# Altium PCB PCB_y262lpt_2022-03-24.pcbdoc
Units mil, origin at the board's own origin, x right, y up, seen from the top; angles counter-clockwise.
Board outline 3740 x 3696.58 mil, 2 copper layers (Top Layer, Bottom Layer); 29 components, 43 nets, 164 pads, 13 vias.
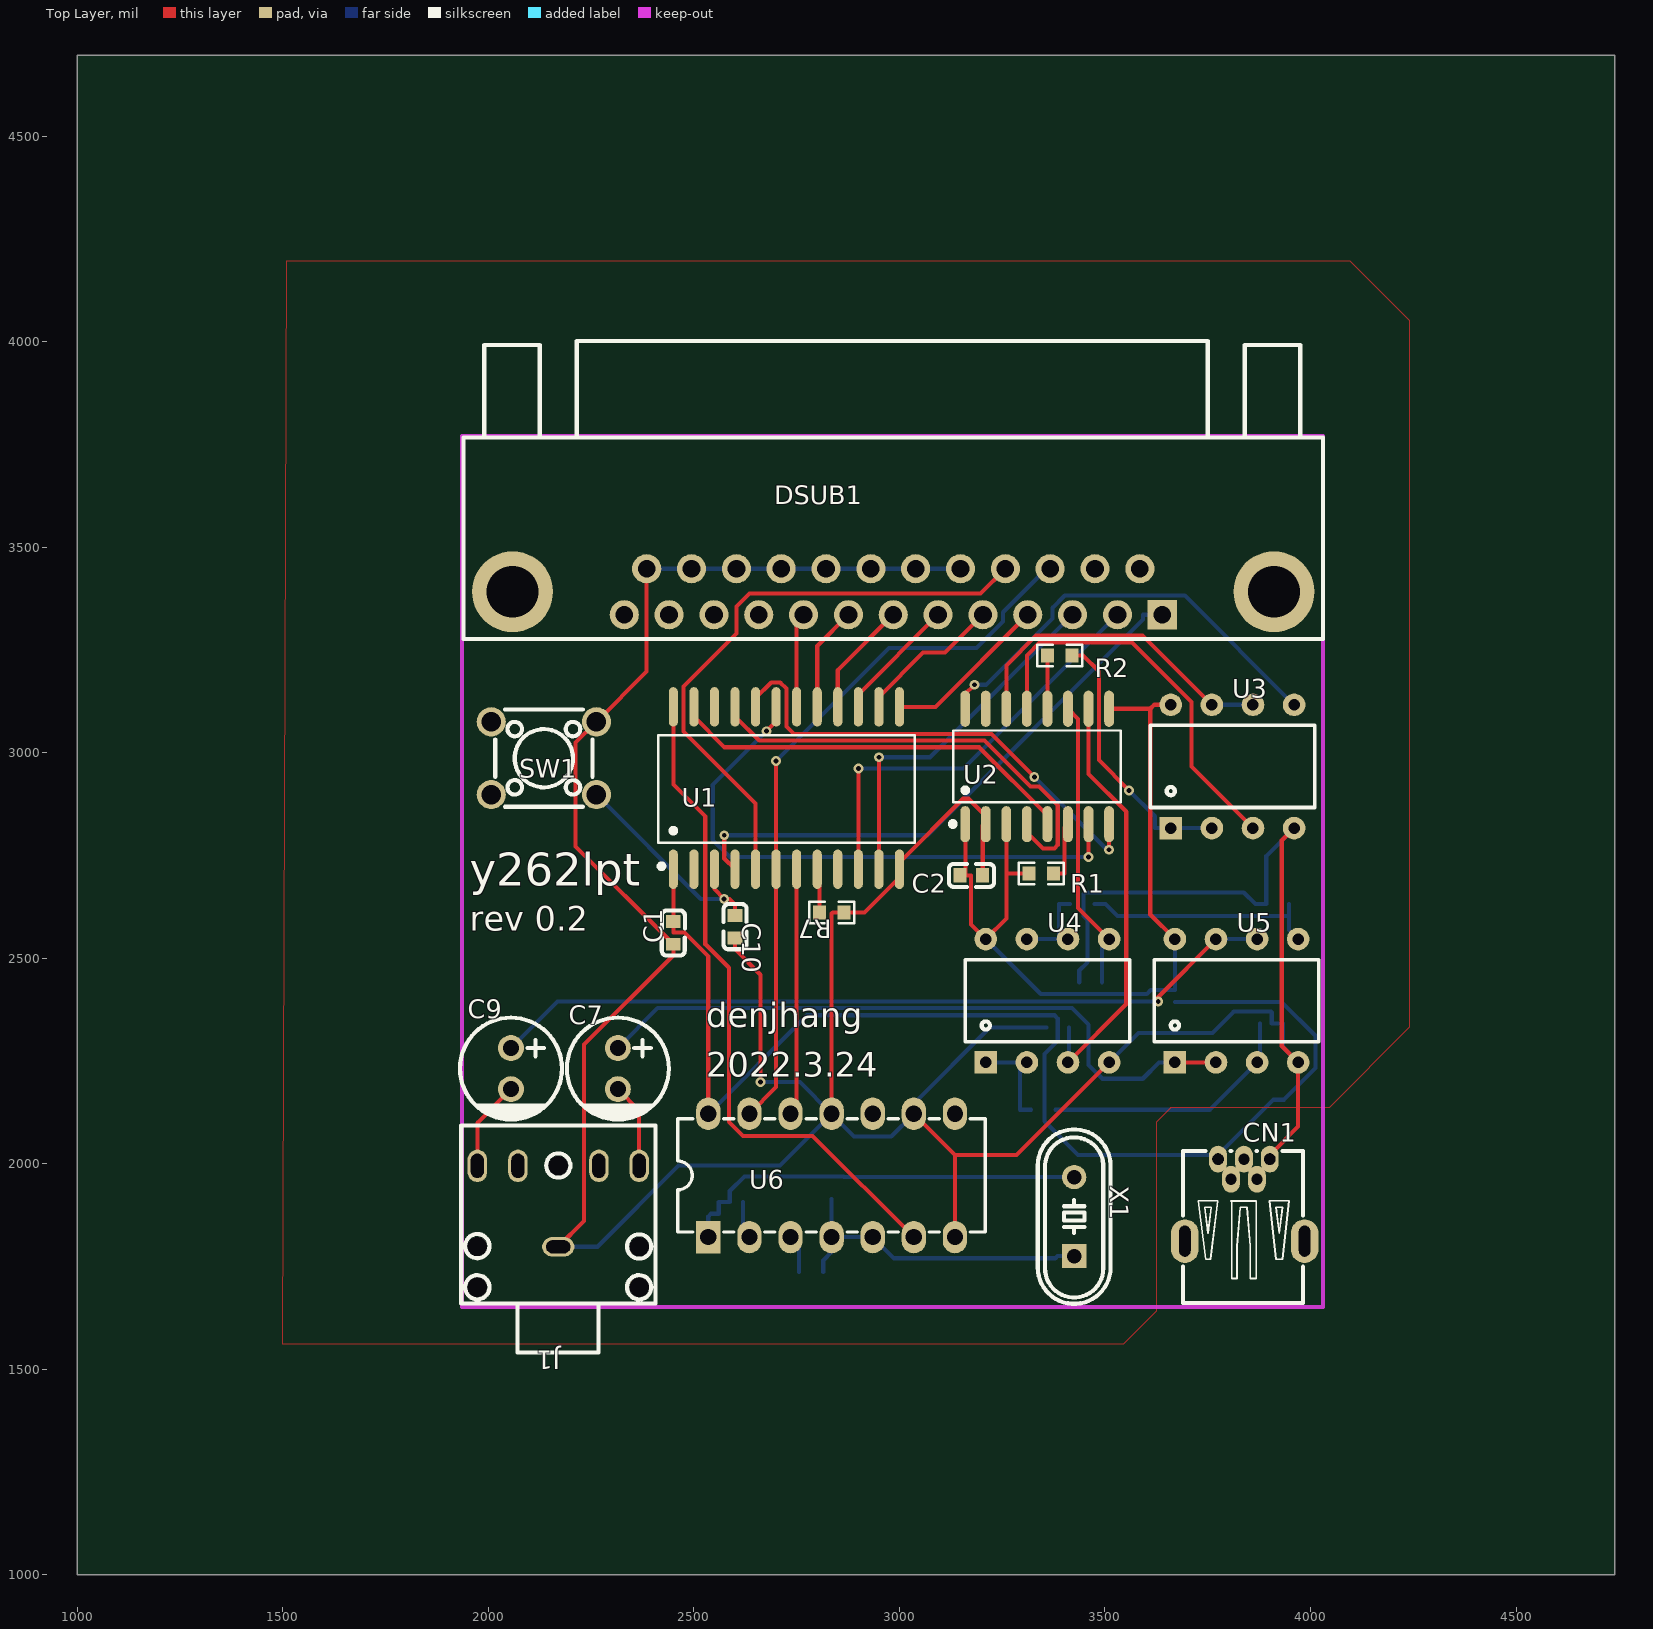
[diagram p0: Top Layer view]
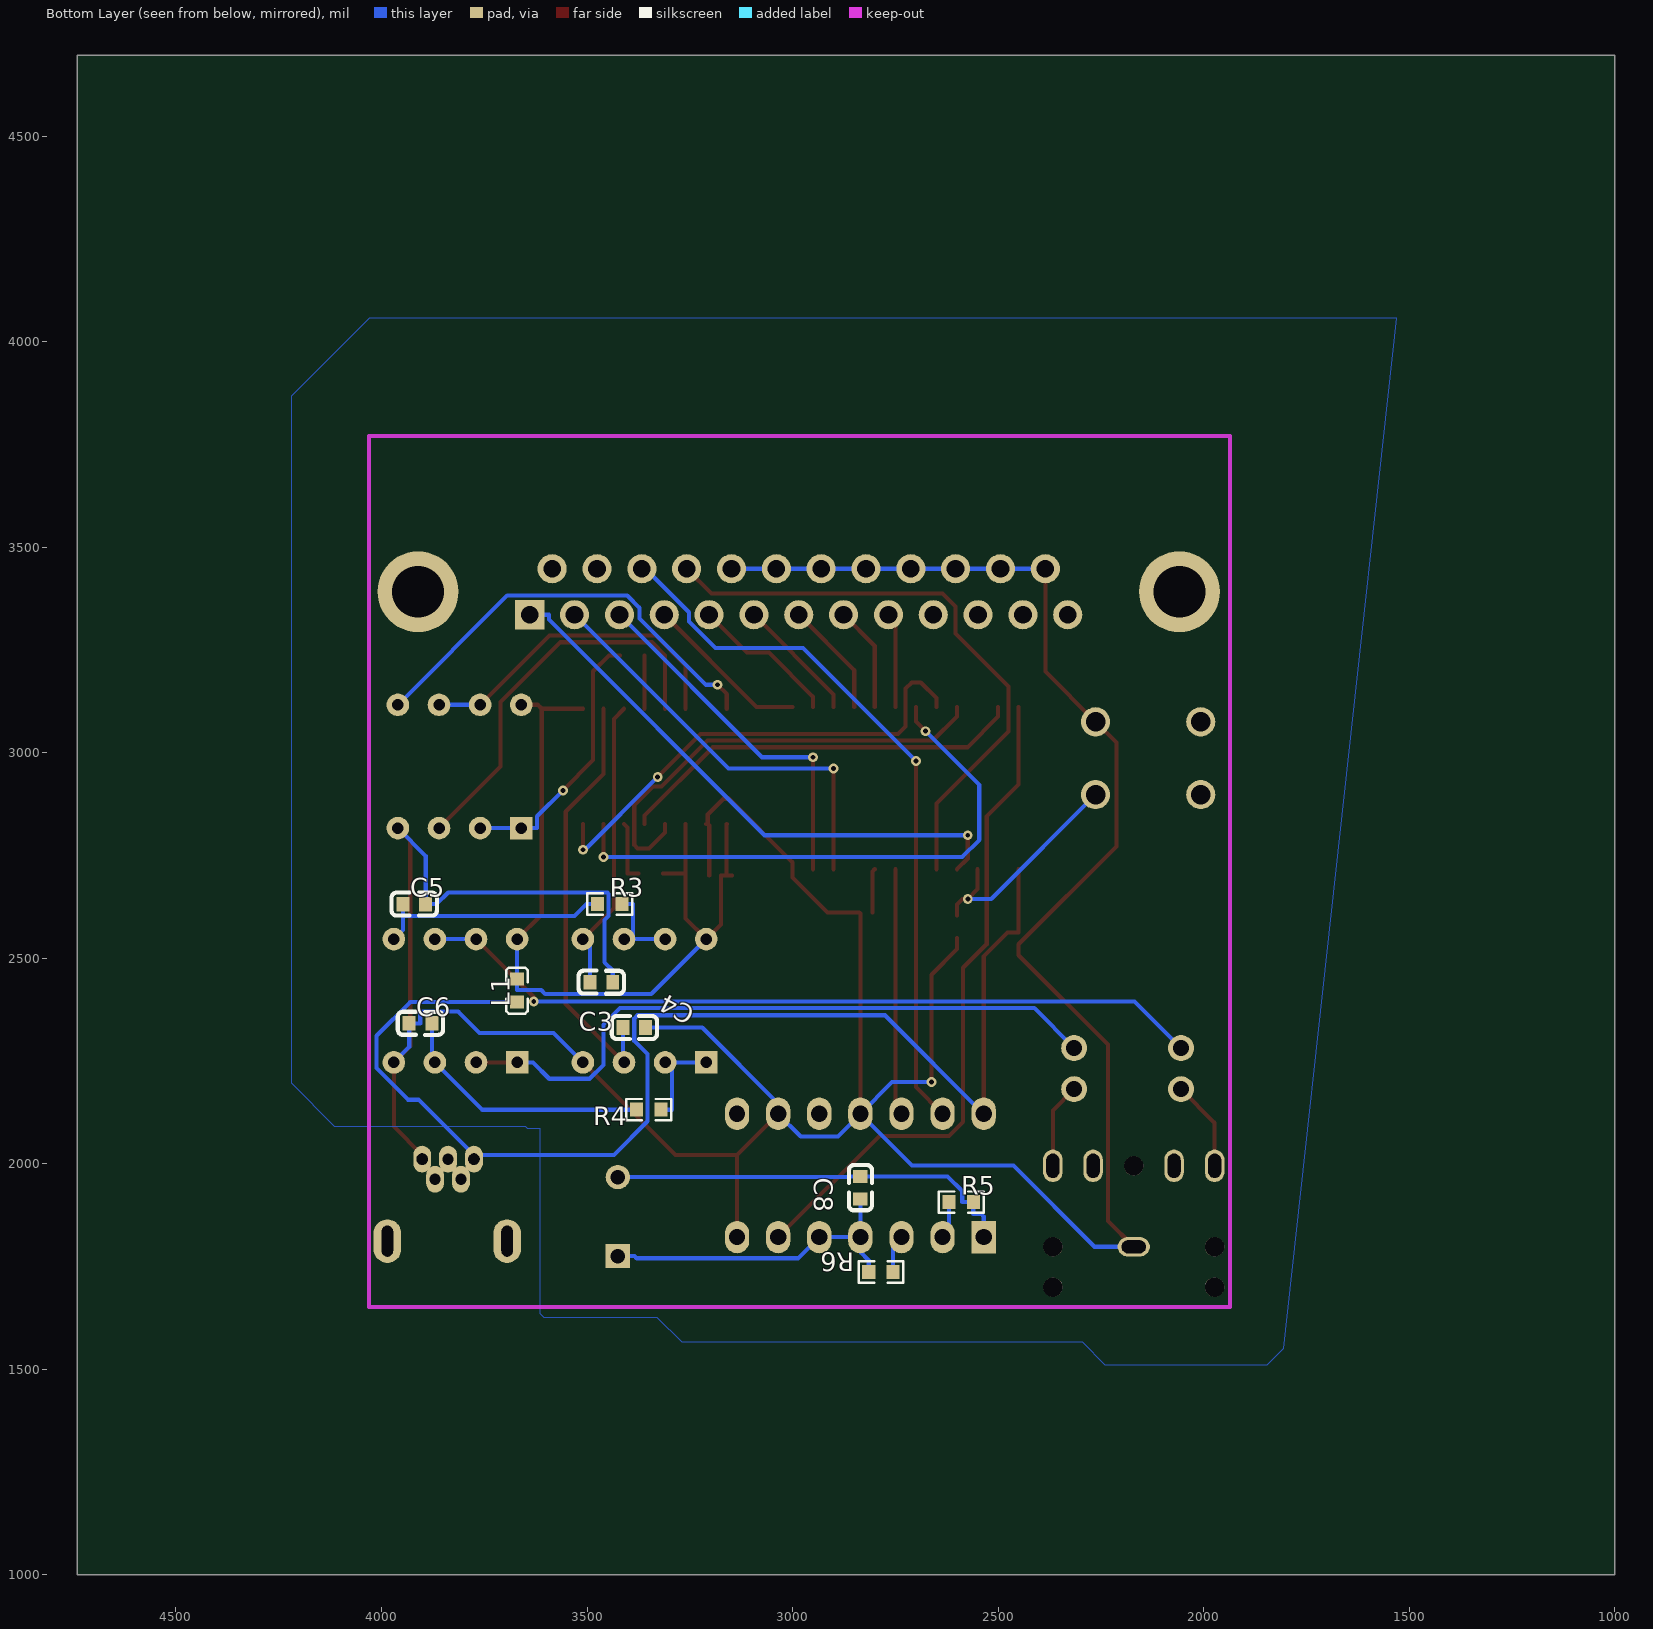
[diagram p1: Bottom Layer view, seen from below]

## Layer stack, top to bottom
Top Layer: signal copper (thickness not stored)
Dielectric: dielectric 12.6, FR-4, Dk 4.8
Bottom Layer: signal copper (thickness not stored)

## Board outline
4740,1000 1000,1000 1000,4696.58 4740,4696.58

## Components (designator, comment, footprint, x,y, rotation, side; value= is the part's Value field where it differs from the comment)
C1 "0.1u" C0603#1 2450,2561.58 r90 top
C2 "0.1u" C0603#1 3175,2701.58 r180 top
C3 "1.5n" C0603#2 3465,2441.58 r0 bottom
C4 "1.5n" C0603#2 3385,2331.58 r180 bottom
C5 "10n" C0603#2 3920,2631.58 r0 bottom
C6 "10n" C0603#2 3905,2341.58 r0 bottom
C7 "4.7uF" CAP-TH_BD6.3-P2.50-D1.0-FD 2315,2231.58 r270 top
C8 "4.7n" C0603#2 2835,1941.58 r90 bottom
C9 "4.7uF" CAP-TH_BD6.3-P2.50-D1.0-FD 2055,2231.58 r270 top
C10 "2.2n" C0603#1 2600,2576.58 r270 top
CN1 "54819-0519" USB-MINI-SMD_5P-P0.80-H-F_54819-0519 3840,1916.58 r0 top
DSUB1 "FDB2501-M0DB300K6KA" DB25-TH_FDB2501-M0DB300K6KA 2984.96,3391.59 r180 top
J1 "PJ-307C" AUDIO-TH_PJ307C 2170,1896.58 r180 top
L1 "100Ω" L0603 3670,2421.58 r270 bottom
R1 "4.7k" R0603#1 3345,2706.58 r0 top
R2 "100R" R0603#1 3390,3236.58 r180 top
R3 "1.8k" R0603#2 3445,2631.58 r0 bottom
R4 "1.8k" R0603#2 3350,2131.58 r0 bottom
R5 "470r" R0603#2 2590,1906.58 r0 bottom
R6 "470r" R0603#2 2785,1736.58 r180 bottom
R7 "10k" R0603#1 2835,2611.58 r180 top
SW1 "C13828" SW-TH_4P-L6.0-W6.0-P4.50-LS6.5 2135,2986.58 r180 top
U1 "YMF262-M" YMF262-M 2725,2911.58 r0 top
U2 "YAC512" SOP-16_L10.3-W5.4-P1.27-LS7.8-BL 3335,2966.58 r0 top
U3 "SA5532AP" DIP8 3810,2966.58 r0 top
U4 "SA5532AP" DIP8 3360,2396.58 r0 top
U5 "SA5532AP" DIP8 3820,2396.58 r0 top
U6 "SN74HCT04N" DIP-14_L19.0-W7.0-P2.54-LS7.6-BL 2835,1971.58 r0 top
X1 "14.31818MHZ" HC-49US_L11.5-W4.5-P4.88 3425,1871.58 r90 top

## Footprints (in the part's own frame and the unit in brackets; to place one, negate y for a bottom-side part, rotate by r counter-clockwise, add the part's x,y. Pads: shape width x height; smd on the part's side, far side on the other; paste and mask are expansions set on the pad)
AUDIO-TH_PJ307C [mm]
  oval 2x1.2 hole 0.8 slot 1.5 at 0 deg: 1(0,2.5)
  oval 1.2x2 hole 0.8 slot 1.5 at 90 deg: 2(5,-2.5) 3(2.489,-2.5) 4(-2.511,-2.5) 5(-5,-2.5)
  round 1.2 hole 1.2 unplated: ""(-5,5) ""(-5,2.5) ""(0,-2.5) ""(5,5) ""(5,2.5)
  silkscreen extent -6.01,-4.99 5.99,9.03
C0603#1 [mm]
  rect 0.8x0.9 smd: 1(-0.7,0) 2(0.7,0)
  silkscreen extent -1.41,-0.71 1.39,0.72
C0603#2 [mm]
  rect 0.8x0.9 smd: 1(0.7,0) 2(-0.7,0)
  silkscreen extent -1.39,-0.72 1.41,0.71
CAP-TH_BD6.3-P2.50-D1.0-FD [mm]
  round 1.6 hole 1: 1(-1.27,0) 2(1.27,0)
  silkscreen extent -3.15,-3.15 3.17,3.15
DB25-TH_FDB2501-M0DB300K6KA [mm]
  rect 1.8x1.8 hole 1.1: 1(-16.62,1.42)
  round 1.8 hole 1.1: 2(-13.85,1.42) 3(-11.08,1.42) 4(-8.31,1.42) 5(-5.54,1.42) 6(-2.77,1.42) 7(0,1.42) 8(2.77,1.42) 9(5.54,1.42) 10(8.31,1.42) 11(11.08,1.42) 12(13.85,1.42) 13(16.62,1.42) 14(-15.235,-1.42) 15(-12.465,-1.42) 16(-9.695,-1.42) 17(-6.925,-1.42) 18(-4.155,-1.42) 19(-1.385,-1.42) 20(1.385,-1.42) 21(4.155,-1.42) 22(6.925,-1.42) 23(9.695,-1.42) 24(12.465,-1.42) 25(15.235,-1.42)
  round 5 hole 3.2: 26(-23.52,0) 27(23.52,0)
  silkscreen extent -26.54,-15.49 26.54,2.92
DIP8 [mil]
  rect 55x55 hole 28: 1(-150,-150)
  round 55 hole 28: 2(-50,-150) 3(50,-150) 4(150,-150) 5(150,150) 6(50,150) 7(-50,150) 8(-150,150)
  silkscreen extent -200,-100 200,100
DIP-14_L19.0-W7.0-P2.54-LS7.6-BL [mm]
  rect 1.5x2 hole 1: 1(-7.62,-3.81)
  oval 1.5x2 hole 1: 2(-5.08,-3.81) 3(-2.54,-3.81) 4(0,-3.81) 5(2.54,-3.81) 6(5.08,-3.81) 7(7.62,-3.81) 8(7.62,3.81) 9(5.08,3.81) 10(2.54,3.81) 11(0,3.81) 12(-2.54,3.81) 13(-5.08,3.81) 14(-7.62,3.81)
  silkscreen extent -9.5,-3.5 9.5,3.5
HC-49US_L11.5-W4.5-P4.88 [mm]
  rect 1.5x1.5 hole 0.9: 1(-2.44,0)
  round 1.5 hole 0.9: 2(2.44,0)
  silkscreen extent -5.39,-2.25 5.39,2.25
L0603 [mm]
  rect 0.8x0.864 smd: 1(0.7,0) 2(-0.7,0)
  silkscreen extent -1.41,-0.67 1.42,0.65
R0603#1 [mil]
  rect 31.75x34.02 smd: 1(-29.66,0) 2(29.66,0)
  silkscreen extent -55,-26 55,26
R0603#2 [mil]
  rect 31.75x34.02 smd: 1(29.66,0) 2(-29.66,0)
  silkscreen extent -55,-26 55,26
SOP-16_L10.3-W5.4-P1.27-LS7.8-BL [mil]
  oval 23.7x87.83 smd: 1(-175,-140.37) 2(-125,-140.37) 3(-75,-140.37) 4(-25,-140.37) 5(25,-140.37) 6(75,-140.37) 7(125,-140.37) 8(175,-140.37) 9(175,140.37) 10(125,140.37) 11(75,140.37) 12(25,140.37) 13(-25,140.37) 14(-75,140.37) 15(-125,140.37) 16(-175,140.37)
  silkscreen extent -211,-146 204,87
SW-TH_4P-L6.0-W6.0-P4.50-LS6.5 [mm]
  round 1.8 hole 1.2: 1(-3.25,2.25) 2(3.25,2.25) 3(-3.25,-2.25) 4(3.25,-2.25)
  silkscreen extent -3,-3 3,3
USB-MINI-SMD_5P-P0.80-H-F_54819-0519 [mm]
  oval 1.1x1.65 hole 0.7 slot 0.705 at 90 deg: 1(-1.65,2.409) 5(1.55,2.409)
  oval 1.1x1.65 hole 0.7: 2(-0.848,1.166) 3(-0.05,2.409) 4(0.752,1.166)
  oval 1.7x2.7 hole 0.7 slot 1.901 at 90 deg: 6(3.7,-2.664) 7(-3.7,-2.664)
  silkscreen extent -3.81,-6.48 3.6,2.92
YMF262-M [mm]
  oval 0.56x2.432 smd: 1(-6.985,-4.953) 2(-5.715,-4.953) 3(-4.445,-4.953) 4(-3.175,-4.953) 5(-1.905,-4.953) 6(-0.635,-4.953) 7(0.635,-4.953) 8(1.905,-4.953) 9(3.175,-4.953) 10(4.445,-4.953) 11(5.715,-4.953) 12(6.985,-4.953) 13(6.985,5.08) 14(5.715,5.08) 15(4.445,5.08) 16(3.175,5.08) 17(1.905,5.08) 18(0.635,5.08) 19(-0.635,5.08) 20(-1.905,5.08) 21(-3.175,5.08) 22(-4.445,5.08) 23(-5.715,5.08) 24(-6.985,5.08)
  silkscreen extent -7.92,-4.92 7.92,3.32

## Via types
v1: diameter 24.02, hole 12.01, Top Layer to Bottom Layer, tented both sides, 13 vias

## Nets (pads, with @x,y where several pads share a name; then routed paths per layer and width w, separated by ;. In a path a pad name is that pad's centre, name@x,y a point inside that pad or via, vN(x,y) a via of type N, cw(c..) or ccw(c..) an arc to the next point about the centre after c; other vN are vias at no path point)
1A: C8.1 R5.2 U6.1 X1.2 | length 1013.4
  Bottom Layer w10: U6.1 2535,1871.94 2541.64,1878.58 2560.34,1878.58 2560.34,1892.58 R5.2 2587.21,1906.58 2587.21,1933.45 2622.9,1969.14 C8.1 2863.71,1969.14 2865.21,1967.64 X1.2
1Y: R5.1 U6.2 | length 91.4
  Bottom Layer w10: R5.1 2619.66,1836.92 U6.2
2A: R6.1 U6.3 | length 93.4
  Bottom Layer w10: U6.3 2755.34,1801.24 R6.1
2Y: C8.2 R6.2 U6.4 U6.5 X1.1 | length 799.4
  Bottom Layer w10: R6.2 2814.66,1764.58 2835,1784.92 U6.4 ; C8.2 U6.4 ; X1.1 3384.48,1775.52 3379.05,1770.09 2986.49,1770.09 U6.5 U6.4
/CS: R7.2 U1.8 | length 107.2
  Top Layer w10: U1.8 2805.34,2711.24 R7.2
/IC: C10.1 SW1.1 U1.3 | length 556.5
  Top Layer w10: U1.3 2550,2668.03 v1(2573.72,2644.31) 2586.57,2644.31 2600,2630.88 C10.1
  Bottom Layer w10: SW1.1 2516.64,2644.31 v1(2573.72,2644.31)
/RD: U1.7 U6.12 | length 601.2
  Top Layer w10: U6.12 2750,2136.58 U1.7
/WR: DSUB1.16 U1.6 U6.13 | length 1759
  Top Layer w10: U6.13 2700,2186.58 U1.6 v1(2700,2979.89)
  Bottom Layer w10: v1(2700,2979.89) 2974.84,3254.73 3187.87,3254.73 3251.93,3318.79 3251.93,3341.73 3357.69,3447.49 DSUB1.16@3366.65,3447.49
A0: DSUB1.1 U1.4 | length 1387.9
  Top Layer w10: v1(2573.87,2799.2) 2573.87,2742.71 U1.4
  Bottom Layer w10: v1(2573.87,2799.2) 3067.99,2799.2 3592.87,3324.08 3592.87,3335.68 DSUB1.1
A1: DSUB1.17 U1.5 | length 1456.7
  Top Layer w10: U1.5 2650,2876.69 2475,3051.69 2475,3161.06 2603.7,3289.76 2603.7,3355.41 2635.64,3387.35 3197.46,3387.35 DSUB1.17
A.VCC: C2.2 L1.2 R1.1 U2.1 U2.3 U2.9 U3.8 U4.8 U5.8 | length 2060
  Top Layer w10: C2.2 C2.2@3160.81,2701.58 ; U2.1 3160.81,2825.4 C2.2@3160.81,2701.58 ; U2.3 3260,2706.58 ; R1.1 3288.48,2706.58 3260,2706.58 ; U2.9 3610.11,3106.95 ; U3.8 3619.74,3116.58 3610.11,3106.95 ; U5.8 3610.11,2606.47 3610.11,3106.95 ; C2.2@3160.81,2701.58 3174.18,2701.58 3174.18,2582.4 U4.8 3260,2596.58 3260,2706.58
  Bottom Layer w10: U4.8 3343.78,2412.8 3601.74,2412.8 3611.34,2422.4 3670.01,2422.4 L1.2 U5.8
AOUT: U2.13 U3.3 | length 972.2
  Top Layer w10: U2.13 3310,3236.59 3342.19,3268.78 3564.75,3268.78 3710,3123.53 3710,2966.58 U3.3
CH1: C4.2 U2.10 U4.3 | length 1043.2
  Top Layer w10: U4.3 3551.79,2388.37 3551.79,2856.46 3460,2948.25 U2.10
  Bottom Layer w10: U4.3 3412.56,2249.14 C4.2
CH2: C3.1 U2.11 U4.5 | length 714
  Top Layer w10: U2.11 3434.54,3082.41 3434.54,2622.04 U4.5
  Bottom Layer w10: C3.1 3492.56,2529.14 U4.5
CV: U2.16 U3.5 | length 1060.1
  Top Layer w10: U2.16 3160,3142.28 v1(3182.97,3165.25)
  Bottom Layer w10: v1(3182.97,3165.25) 3210.98,3165.25 3372.32,3326.59 3372.32,3352.56 3402.17,3382.41 3694.17,3382.41 U3.5
D0: DSUB1.2 U1.10 | length 1030.2
  Top Layer w10: U1.10 v1(2900,2961.64)
  Bottom Layer w10: v1(2900,2961.64) 3156.19,2961.64 DSUB1.2
D1: DSUB1.3 U1.11 | length 887.2
  Top Layer w10: U1.11 v1(2950,2989.02)
  Bottom Layer w10: v1(2950,2989.02) 3074.52,2989.02 DSUB1.3
D2: DSUB1.4 U1.13 | length 404.9
  Top Layer w10: U1.13 3088.02,3111.58 DSUB1.4
D3: DSUB1.5 U1.14 | length 360.2
  Top Layer w10: U1.14 2950,3136.01 3057.58,3243.59 3110.98,3243.59 DSUB1.5
D4: DSUB1.6 U1.15 | length 304.5
  Top Layer w10: U1.15 2900,3141.66 DSUB1.6
D5: DSUB1.7 U1.16 | length 280
  Top Layer w10: U1.16 2850,3200.72 DSUB1.7
D6: DSUB1.8 U1.17 | length 255.5
  Top Layer w10: U1.17 2800,3259.78 DSUB1.8
D7: DSUB1.9 U1.18 | length 231.1
  Top Layer w10: U1.18 2750,3318.83 DSUB1.9@2766.85,3335.68
DOAB: U1.21 U2.4 | length 1109.2
  Top Layer w10: U1.21 2600,3088.19 2658.95,3029.24 3207.35,3029.24 3318.48,2918.11 3339.2,2918.11 3385,2872.31 3385,2775.21 3377.15,2767.36 3348.98,2767.36 3310,2806.34 U2.4
GND: C1.1 C2.1 C3.2 C4.1 C5.2 C6.1 C10.2 CN1.5 DSUB1.18 DSUB1.19 DSUB1.20 DSUB1.21 DSUB1.22 DSUB1.23 DSUB1.24 DSUB1.25 J1.1 R7.1 SW1.3 U1.12 U2.2 U3.4 U4.4 U5.4 U6.7 U6.9 U6.11 | length 9085.6
  Top Layer w10: J1.1 2232.48,1860.63 2232.48,2289.76 2450,2507.28 C1.1 2212.26,2771.76 2212.26,3024.47 SW1.3 2385.16,3197.37 DSUB1.25 ; C10.2 2600,2522.28 2662.45,2459.83 v1(2662.45,2198.52) ; U6.11 2835,2608.79 2837.79,2611.58 2854.5,2611.58 R7.1 2915.23,2611.58 3000,2696.35 U1.12 3000,2733.42 3154.57,2887.99 3168.04,2887.99 3206.28,2849.75 U2.2@3206.28,2826.21 ; U6.9 3135,2021.58 ; U6.7 3135,2021.58 ; C2.1 3202.56,2822.49 U2.2@3206.28,2826.21 ; U2.2 U2.2@3206.28,2826.21 ; U4.4 3285,2021.58 3135,2021.58 ; CN1.5@3901.02,2021.44 3970,2090.42 U5.4 3930.01,2286.57 3930.01,2786.59 U3.4
  Bottom Layer w10: J1.1 2265.03,1798.15 2462.83,1995.95 2709.37,1995.95 U6.11 ; DSUB1.25 DSUB1.24 DSUB1.23 DSUB1.22 DSUB1.21 DSUB1.20 DSUB1.19 DSUB1.18 ; v1(2662.45,2198.52) 2758.06,2198.52 U6.11 ; C4.1 3219.71,2331.58 3035,2146.87 U6.9 2980.1,2066.68 2889.9,2066.68 U6.11 ; C3.2 3437.44,2470.29 3457.33,2490.18 3457.33,2593.15 3447.72,2602.76 3447.72,2656.74 3450.63,2659.65 3837.63,2659.65 3865.7,2631.58 C5.2 3892.44,2749.02 U3.4 ; U4.4 3581.6,2318.18 3761.16,2318.18 3813.37,2370.39 3903.75,2370.39 3905.82,2368.32 3905.82,2341.58 C6.1 3932.56,2284.02 U5.4
M: U1.24 U6.6 | length 1631.5
  Top Layer w10: U1.24 2450,2923 2527.74,2845.26 2527.74,2534.11 2585,2476.85 2585,2102.18 2619.36,2067.82 2788.76,2067.82 U6.6
MP: U2.14 U3.6 U3.7 | length 805.2
  Top Layer w10: U2.14 3260,3212.44 3332.4,3284.84 3591.74,3284.84 U3.7
  Bottom Layer w10: U3.7 U3.6
OUT.L: C7.2 J1.5 | length 208.1
  Top Layer w10: C7.2 2366.85,2129.73 J1.5@2366.85,1995
OUT.R: C9.2 J1.2 | length 220.5
  Top Layer w10: J1.2 1973.15,2099.73 C9.2
S$164: 
SMPAC: U1.20 U2.8 | length 1181.3
  Top Layer w10: U1.20 2650,3132.62 2688.16,3170.78 2709.95,3170.78 2725,3155.73 2725,3063.58 2743.28,3045.3 3223.9,3045.3 v1(3328.03,2941.17) ; v1(3509.4,2763.91) 3509.4,2825.61 U2.8
  Bottom Layer w10: v1(3328.03,2941.17) 3505.29,2763.91 v1(3509.4,2763.91)
SMPBC: U1.19 U2.7 | length 1398.5
  Top Layer w10: v1(2676.37,3052.3) 2700,3075.93 U1.19 ; v1(3460,2746.54) U2.7
  Bottom Layer w10: v1(2676.37,3052.3) 2545.72,2921.65 2545.72,2788.16 2587.34,2746.54 v1(3460,2746.54)
SWIN: R2.2 U2.12 | length 129.8
  Top Layer w10: U2.12 3360.34,3107.29 R2.2
SY: U1.23 U2.5 | length 1004.6
  Top Layer w10: U1.23 2500,3087.77 2574.58,3013.19 3194.21,3013.19 3360,2847.4 U2.5
U2_6: R1.2 U2.6 | length 150
  Top Layer w10: R1.2 3401.52,2706.58 3401.52,2817.73 U2.6
U3_1: R2.1 U3.1 U3.2 | length 657.8
  Top Layer w10: R2.1 3446.52,3236.58 3485,3198.1 3485,2981.95 v1(3558.49,2908.46)
  Bottom Layer w10: v1(3558.49,2908.46) 3621.51,2845.44 3621.51,2816.58 U3.1 U3.2
U4_1: R4.2 U4.1 U4.2 | length 241.9
  Bottom Layer w10: U4.1 U4.2@3293.48,2246.58 ; U4.2 U4.2@3293.48,2246.58 ; R4.2 3293.48,2131.58 U4.2@3293.48,2246.58
U4_6: R3.2 U4.6 U4.7 | length 211.9
  Bottom Layer w10: U4.7 U4.6@3388.48,2546.58 ; U4.6 U4.6@3388.48,2546.58 ; R3.2 3388.48,2631.58 U4.6@3388.48,2546.58
U5_1: C7.1 U5.1 U5.2 | length 1640
  Top Layer w10: U5.1 U5.2
  Bottom Layer w10: C7.1 2411.93,2378.51 3419.79,2378.51 3460,2338.3 3460,2240.47 3493.56,2206.91 3591.84,2206.91 3631.51,2246.58 U5.1
U5_3: C6.2 R4.1 U5.3 | length 636.1
  Bottom Layer w10: R4.1 3755,2131.58 U5.3 3877.44,2254.02 C6.2
U5_5: C5.1 R3.1 U5.5 | length 579.1
  Bottom Layer w10: R3.1 3501.52,2631.58 3530.3,2602.8 3947.56,2602.8 ; C5.1 3947.56,2602.8 ; U5.5 3947.56,2569.02 3947.56,2602.8
U5_6: C9.1 U5.6 U5.7 | length 1931.6
  Top Layer w10: v1(3629.61,2394.56) 3629.61,2406.19 U5.7
  Bottom Layer w10: C9.1 2167.98,2394.56 v1(3629.61,2394.56) ; U5.7 U5.6
VCC: C1.2 CN1.1 L1.1 U1.1 U6.14 | length 3098.3
  Top Layer w10: U1.1 C1.2 2450,2575.77 2450,2562.4 2476.74,2562.4 2535,2504.14 U6.14
  Bottom Layer w10: U6.14 2774.7,2361.28 3377.22,2361.28 3385,2353.5 3385,2298.99 3352.72,2266.71 3352.72,2103.51 3434.79,2021.44 3775.04,2021.44 3909.51,2155.91 3935.47,2155.91 4012.52,2232.96 4012.52,2311.41 3929.91,2394.02 L1.1
pads on no net: CN1.2 CN1.3 CN1.4 CN1.6 CN1.7 DSUB1.10 DSUB1.11 DSUB1.12 DSUB1.13 DSUB1.14 DSUB1.15 DSUB1.26 DSUB1.27 J1. J1.3 J1.4 SW1.2 SW1.4 U1.2 U1.9 U1.22 U2.15 U6.8 U6.10

## Polygon pours and split planes (outlines as drawn)
GND on Bottom Layer (solid): 1530,4056.58 4030,4056.58 4220,3866.58 4220,2196.58 4115,2091.58 3650,2091.58 3645,2086.58 3615,2086.58 3615,1636.58 3605,1626.58 3330,1626.58 3270,1566.58 2295,1566.58 2240,1511.58 1845,1511.58 1805,1551.58
GND on Top Layer (solid): 1510,4196.58 4095,4196.58 4240,4051.58 4240,2331.58 4045,2136.58 3660,2136.58 3625,2101.58 3625,1641.58 3545,1561.58 1500,1561.58

## Silkscreen, mask and mechanical layers (free items; w line width, h text height)
Top Overlay:
  text "y262lpt" at 1955,2676.58 h80
  text "rev 0.2" at 1955,2567.05 h59.05
  text "denjhang" at 2530,2332.05 h59.05
  text "2022.3.24" at 2530,2212.05 h59.05